# Altium PCB 水表通用工装一版PCB.PcbDoc (part 2 of 2)
Units mm, origin at the board's own origin, x right, y up, seen from the top; angles counter-clockwise.
Board outline 56.13 x 113.41 mm, 2 copper layers (Top Layer, Bottom Layer); 164 components, 131 nets, 500 pads, 301 vias.
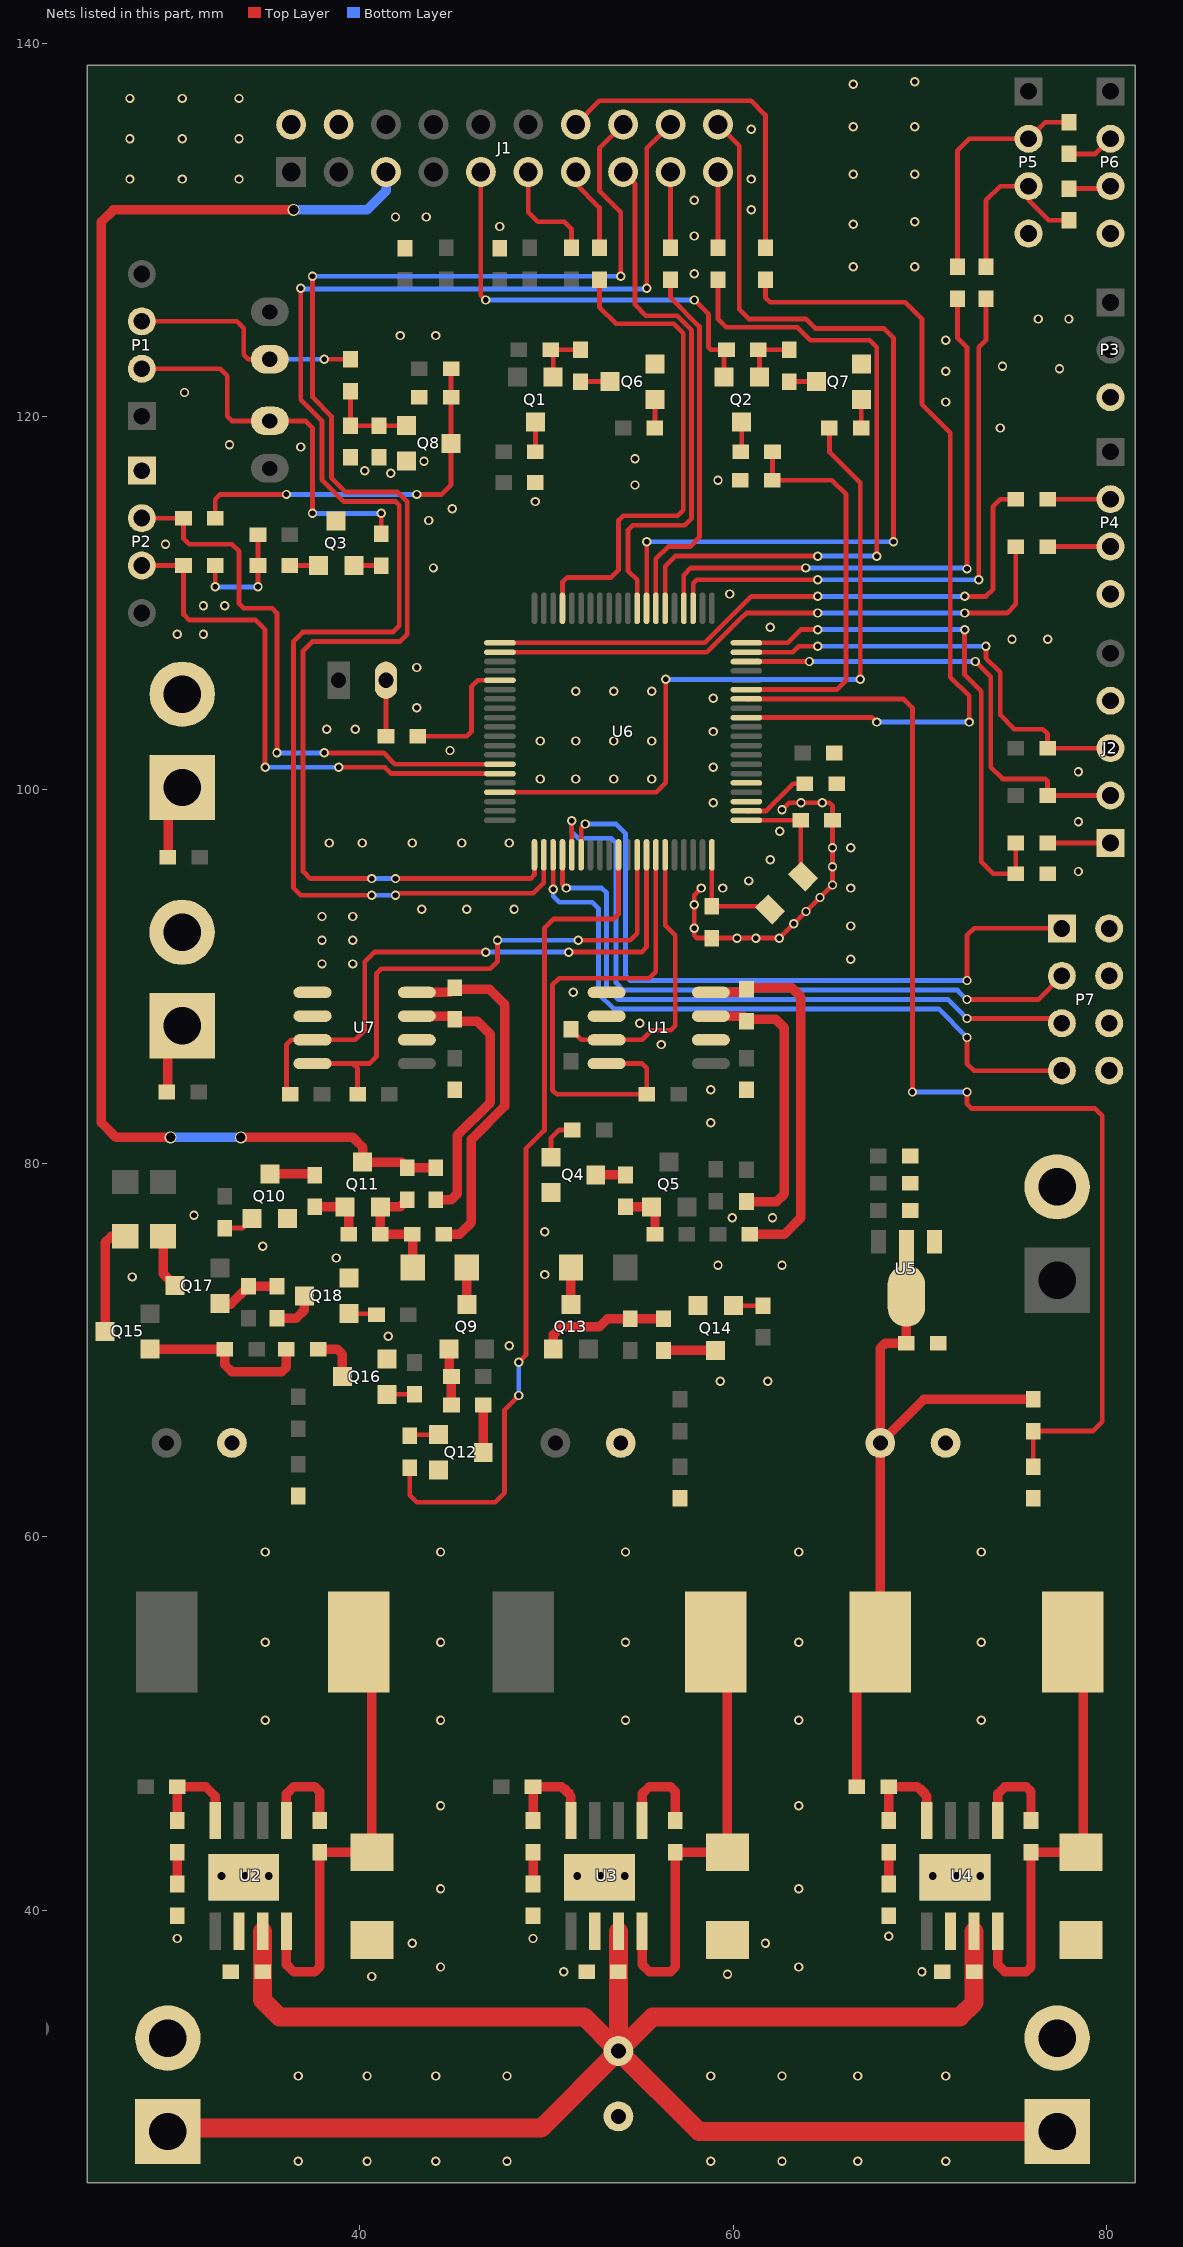
[diagram p2: the nets of this part, all layers, seen from the top]

## Via types
v1: diameter 0.5, hole 0.3, Top Layer to Bottom Layer, tented both sides, 272 vias
v2: diameter 0.635, hole 0.508, Top Layer to Bottom Layer, tented both sides, 20 vias
v3: diameter 0.813, hole 0.406, Top Layer to Bottom Layer, 9 vias

## Nets (pads, with @x,y where several pads share a name; then routed paths per layer and width w, separated by ;. In a path a pad name is that pad's centre, name@x,y a point inside that pad or via, vN(x,y) a via of type N, cw(c..) or ccw(c..) an arc to the next point about the centre after c; other vN are vias at no path point) (continued)
FM_RXD: R77.1 U6.3 | length 31.9
  Top Layer w0.254: U6.3@57.852,109.724 57.852,111.065 58.039,111.252 v1(64.516,111.252) ; v1(73.152,111.252) 73.152,123.698 73.533,124.079 R77.1@73.533,126.314
  Bottom Layer w0.254: v1(64.516,111.252) v1(73.152,111.252)
FM_TXD: R76.1 U6.4 | length 31.8
  Top Layer w0.254: U6.4@57.352,109.724 57.352,111.506 57.733,111.887 v1(63.881,111.887) ; R76.1@72.009,126.314 72.009,124.206 72.517,123.698 v1(72.517,111.835)
  Bottom Layer w0.254: v1(63.881,111.887) 72.465,111.887 v1(72.517,111.835)
GND: C1.1 C2.2 C4.2 C6.2 C7.2 C9.2 C10.2 C12.2 C13.2 C14.2 C15.2 C16.2 C17.2 C18.2 C19.2 C20.1 C21.2 C22.2 C23.1 C24.1 D5.1 D7.1 D8.1 J1.2 J1.4 J2.4 JP1.2 JP2.2 JP3.2 JP4.2 JP5.2 P2.1 P3.3 P4.4 P5.4 P6.4 P7.2 P7.4 P7.6 P7.8 Q3.3 Q4.2 Q6.2 Q7.2 Q8.2 Q10.2 Q12.2 Q14.2 Q16.2 Q18.2 R16.2 R18.2 R24.1 R29.1 R34.1 R45.1 R57.1 R60.1 R72.1 R74.1 R75.1 U1.1 U1.2 U1.6 U2.6 U2.9 U3.6 U3.9 U4.6 U4.9 U5.1 U6.63 U6.65 U7.1 U7.2 U7.6 | length 18.5
  Top Layer w0.254: v1(58.293,94.742) 57.912,94.361 57.912,92.202 58.051,92.063 C23.1@58.852,92.063 v1(60.198,92.063) v1(61.214,92.063) v1(62.472,92.063) v1(63.246,92.837) v1(63.894,93.485) v1(64.643,94.234) v1(65.316,94.907) C22.2@65.316,98.374 65.316,99.149 65.151,99.314 62.992,99.314 v1(62.611,98.933)
  other v1: 36.703,26.543 40.386,26.543 44.069,26.543 47.879,26.543 58.801,26.543 62.611,26.543 66.675,26.543 71.374,26.543 36.703,31.115 40.386,31.115 44.069,31.115 47.879,31.115 58.801,31.115 62.611,31.115 66.675,31.115 71.374,31.115 40.64,36.449 59.69,36.576 50.927,36.703 70.104,36.703 44.323,36.957 63.5,36.957 42.799,38.227 61.722,38.227 30.226,38.481 49.276,38.481 68.326,38.608 44.323,41.148 63.5,41.148 44.323,45.593 63.5,45.593 34.925,50.165 44.323,50.165 54.229,50.165 63.5,50.165 73.279,50.165 34.925,54.356 44.323,54.356 54.229,54.356 63.5,54.356 73.279,54.356 34.925,59.182 44.323,59.182 54.229,59.182 63.5,59.182 73.279,59.182 59.309,68.326 61.849,68.326 48.006,70.231 41.529,70.739 27.813,73.914 49.911,74.041 59.182,74.549 62.611,74.549 38.735,74.93 34.798,75.565 49.911,76.327 59.944,77.089 62.103,77.089 31.115,77.216 58.801,82.169 58.801,83.947 56.134,86.36 54.991,87.503 51.435,89.154 37.973,90.678 39.624,90.678 66.294,90.932 37.973,91.948 39.624,91.948 57.912,92.583 66.294,92.71 37.973,93.218 39.624,93.218 43.307,93.599 45.72,93.599 48.26,93.599 57.912,93.853 59.436,94.742 66.294,94.742 60.833,95.123 78.486,95.631 65.316,95.885 61.976,96.266 65.316,96.901 66.294,96.901 38.354,97.155 40.132,97.155 42.799,97.155 45.466,97.155 48.006,97.155 62.484,97.79 78.486,98.298 58.928,99.314 63.627,99.314 64.77,99.314 49.657,100.584 51.562,100.584 53.594,100.584 55.626,100.584 78.486,100.965 58.928,101.219 44.831,102.108 49.657,102.616 51.562,102.616 53.594,102.616 55.626,102.616 58.928,103.124 38.227,103.251 39.751,103.251 43.053,104.394 58.928,104.902 51.562,105.283 53.594,105.283 55.626,105.283 43.053,106.553 74.93,108.077 76.835,108.077 30.226,108.331 31.623,108.331 61.976,108.712 31.623,109.855 32.766,109.855 59.817,110.49 43.942,111.887 29.591,113.157 43.688,114.427 44.958,115.062 49.403,115.443 54.737,116.332 59.182,116.586 41.656,116.967 40.259,117.094 43.434,117.602 54.737,117.729 36.83,118.364 33.02,118.491 74.295,119.38 71.374,120.777 30.607,121.285 71.374,122.428 77.47,122.555 74.422,122.682 71.374,124.079 42.164,124.333 44.069,124.333 76.327,125.222 77.978,125.222 57.912,127.635 66.421,128.016 69.723,128.016 57.912,129.667 47.498,130.175 66.421,130.302 69.723,130.429 41.91,130.683 43.561,130.683 60.96,131.064 57.912,131.572 27.686,132.715 30.48,132.715 33.528,132.715 60.96,132.715 66.421,132.969 69.723,132.969 27.686,134.874 30.48,134.874 33.528,134.874 60.96,135.382 66.421,135.509 69.723,135.509 27.686,137.033 30.48,137.033 33.528,137.033 66.421,137.795 69.723,137.922
  other v3: 32.588,41.827 33.858,41.827 35.128,41.827 51.638,41.827 52.908,41.827 54.178,41.827 70.688,41.827 71.958,41.827 73.228,41.827
gongwei1: P7.1 U6.46 | length 37.8
  Top Layer w0.254: U6.46@51.852,96.524 51.852,97.953 v1(52.07,98.171) ; v1(72.517,89.789) 72.517,92.202 72.898,92.583 P7.1@77.597,92.583
  Bottom Layer w0.254: v1(52.07,98.171) 53.721,98.171 54.229,97.663 54.229,90.043 54.483,89.789 v1(72.517,89.789)
gongwei2: P7.3 U6.45 | length 37.3
  Top Layer w0.254: U6.45@51.352,96.524 v1(51.352,98.342) ; v1(72.517,88.773) 76.327,88.773 P7.3@77.597,90.043
  Bottom Layer w0.254: v1(51.352,98.342) 51.352,97.746 51.689,97.409 53.467,97.409 53.721,97.155 53.721,89.662 54.102,89.281 72.009,89.281 v1(72.517,88.773)
gongwei3: P7.5 U6.44 | length 34.4
  Top Layer w0.254: U6.44@50.852,96.524 50.852,94.944 v1(51.054,94.742) ; v1(72.517,87.757) 77.343,87.757 P7.5@77.597,87.503
  Bottom Layer w0.254: v1(51.054,94.742) 52.959,94.742 53.213,94.488 53.213,89.408 53.848,88.773 71.501,88.773 v1(72.517,87.757)
gongwei4: P7.7 U6.43 | length 36.8
  Top Layer w0.254: v1(50.352,94.675) U6.43@50.352,96.524 ; v1(72.517,86.741) 72.517,85.344 72.898,84.963 P7.7@77.597,84.963
  Bottom Layer w0.254: v1(50.352,94.675) 50.352,94.301 50.673,93.98 52.451,93.98 52.781,93.65 52.781,89.078 53.594,88.265 70.993,88.265 v1(72.517,86.741)
INA1_SCL: R2.2 U1.4 U6.54 | length 26.5
  Top Layer w0.254: U1.4@53.213,85.344 55.118,85.344 55.372,85.09 R2.2@55.372,83.693 50.546,83.693 50.317,83.922 50.317,89.56 50.673,89.916 55.499,89.916 55.852,90.269 U6.54@55.852,96.524
INA1_SDA: R3.2 U1.3 U6.55 | length 15.5
  Top Layer w0.254: R3.2@51.308,87.173 51.867,86.614 U1.3@53.213,86.614 55.118,86.614 55.626,87.122 56.642,87.122 56.896,87.376 56.896,92.202 56.352,92.746 U6.55@56.352,96.524
INA2_SCL: R28.2 U6.52 U7.4 | length 29.5
  Top Layer w0.254: U7.4@37.465,85.344 39.624,85.344 ; R28.2@39.878,83.693 39.878,85.09 39.624,85.344 ; v1(47.371,91.948) 47.371,90.805 46.99,90.424 41.148,90.424 40.894,90.17 40.894,85.725 40.513,85.344 39.624,85.344 ; v1(51.689,91.948) 54.483,91.948 54.852,92.317 U6.52@54.852,96.524
  Bottom Layer w0.254: v1(47.371,91.948) v1(51.689,91.948)
INA2_SDA: R32.2 U6.53 U7.3 | length 31.4
  Top Layer w0.254: R32.2@36.271,83.693 36.068,83.693 36.068,86.36 36.322,86.614 U7.3@37.465,86.614 39.751,86.614 40.259,87.122 40.259,90.805 40.767,91.313 v1(46.736,91.313) ; v1(51.181,91.313) 55.098,91.313 55.352,91.567 U6.53@55.352,96.524
  Bottom Layer w0.254: v1(46.736,91.313) v1(51.181,91.313)
IO1: J1.15 U6.9 | length 29.1
  Top Layer w0.254: J1.15@54.102,133.096 54.737,132.461 54.737,125.984 55.321,125.4 56.999,125.4 57.76,124.639 57.76,114.529 57.404,114.173 54.616,114.173 54.356,113.913 54.356,111.748 54.852,111.252 U6.9@54.852,109.724
IO2: J1.20 U6.8 | length 47
  Top Layer w0.254: U6.8@55.352,109.724 55.372,109.744 v1(55.372,113.284) ; J1.20@59.182,135.636 60.325,134.493 60.325,125.73 60.833,125.222 63.881,125.222 64.389,124.714 68.072,124.714 68.58,124.206 v1(68.58,113.284)
  Bottom Layer w0.254: v1(55.372,113.284) v1(68.58,113.284)
IR_R: C2.1 Q8.3 R1.2 R27.2 | length 20.2
  Top Layer w0.254: R27.2@32.258,114.554 32.258,115.57 32.512,115.824 v1(36.068,115.824) ; v1(43.053,115.824) 44.38,115.824 44.888,116.332 Q8.3@44.888,118.557 C2.1@44.888,121.031 R1.2@44.888,122.555
  Bottom Layer w0.254: v1(36.068,115.824) v1(43.053,115.824)
IR_RXD: P2.2 R27.1 U6.34 | length 31.4
  Top Layer w0.254: P2.2@28.194,114.554 R27.1@30.556,114.554 30.556,113.462 30.861,113.157 33.147,113.157 33.528,112.776 33.528,109.982 33.782,109.728 35.306,109.728 35.56,109.474 v1(35.56,101.981) ; v1(38.1,101.981) 41.275,101.981 41.882,101.374 U6.34@47.502,101.374
  Bottom Layer w0.254: v1(35.56,101.981) v1(38.1,101.981)
IR_T: R11.1 R17.1 R25.2 | length 6.2
  Top Layer w0.254: v1(32.258,110.871) R25.2@32.258,112.014 ; v1(34.544,110.871) R17.1@34.544,112.014 R11.1@34.544,113.665
  Bottom Layer w0.254: v1(32.258,110.871) v1(34.544,110.871)
IR_TXD: P2.3 R25.1 U6.35 | length 29.8
  Top Layer w0.254: P2.3@28.194,112.014 R25.1@30.556,112.014 30.556,109.398 30.861,109.093 34.417,109.093 34.925,108.585 v1(34.925,101.219) ; v1(38.862,101.219) 41.347,101.219 41.692,100.874 U6.35@47.502,100.874
  Bottom Layer w0.254: v1(34.925,101.219) v1(38.862,101.219)
LED: R65.1 U6.25 | length 7.1
  Top Layer w0.254: R65.1@43.104,102.87 45.72,102.87 45.974,103.124 45.974,105.537 46.311,105.874 U6.25@47.502,105.874
MCU_RXD: R48.1 U6.6 | length 36.2
  Top Layer w0.254: U6.6@56.352,109.724 56.352,111.978 56.896,112.522 v1(64.516,112.522) ; R48.1@59.182,127.33 59.182,125.222 59.627,124.777 63.436,124.777 64.135,124.079 67.31,124.079 67.691,123.698 v1(67.691,112.522)
  Bottom Layer w0.254: v1(64.516,112.522) v1(67.691,112.522)
MCU_TXD: R47.1 U6.7 | length 19.9
  Top Layer w0.254: U6.7@55.852,109.724 55.852,112.367 56.515,113.03 57.683,113.03 58.191,113.538 58.191,124.818 56.642,126.367 R47.1@56.642,127.33
NetC3_1: C3.1 R10.2 U1.7 | length 15.3
  Top Layer w0.508: U1.7@58.801,87.884 60.528,87.884 60.706,87.706 62.281,87.706 62.738,87.249 62.738,78.359 62.332,77.953 R10.2@60.706,77.953
NetC3_2: C3.2 R23.2 U1.8 | length 20.1
  Top Layer w0.508: U1.8@58.801,89.154 60.452,89.154 60.706,89.408 63.119,89.408 63.627,88.9 63.627,77.089 62.738,76.2 R23.2@60.884,76.2
NetC4_1: C4.1 Q8.1 R21.1 R24.2 | length 4.8
  Top Layer w0.254: R21.1@39.497,121.285 R24.2@39.497,119.507 C4.1@41.021,119.507 Q8.1@42.488,119.507
NetC5_1: C5.1 D5.2 L1.1 U2.8 | length 24.3
  Top Layer w0.508: U2.8@36.068,38.862 36.068,37.084 36.449,36.703 37.592,36.703 37.846,36.957 C5.1@37.846,43.1 D5.2@40.64,43.1 40.64,53.664 L1.1@39.948,54.356
NetC5_2: C5.2 U2.1 | length 5
  Top Layer w0.508: U2.1@36.068,44.802 36.068,46.228 36.449,46.609 37.592,46.609 37.846,46.355 C5.2@37.846,44.802
NetC8_1: C8.1 D7.2 L2.1 U3.8 | length 24.3
  Top Layer w0.508: U3.8@55.118,38.862 55.118,37.084 55.499,36.703 56.642,36.703 56.896,36.957 C8.1@56.896,43.1 D7.2@59.69,43.1 59.69,53.664 L2.1@58.998,54.356
NetC8_2: C8.2 U3.1 | length 5
  Top Layer w0.508: U3.1@55.118,44.802 55.118,46.228 55.499,46.609 56.642,46.609 56.896,46.355 C8.2@56.896,44.802
NetC11_1: C11.1 D8.2 L3.1 U4.8 | length 24.3
  Top Layer w0.508: U4.8@74.168,38.862 74.168,37.084 74.549,36.703 75.692,36.703 75.946,36.957 C11.1@75.946,43.1 78.74,43.1 78.74,53.664 L3.1@78.048,54.356
NetC11_2: C11.2 U4.1 | length 5
  Top Layer w0.508: U4.1@74.168,44.802 74.168,46.228 74.549,46.609 75.692,46.609 75.946,46.355 C11.2@75.946,44.802
NetC19_1: C19.1 U6.62 | length 3.7
  Top Layer w0.254: U6.62@60.702,98.874 61.767,98.874 63.223,100.33 C19.1@63.83,100.33
NetC25_1: C25.1 R36.2 U7.7 | length 14.9
  Top Layer w0.508: U7.7@43.053,87.884 44.907,87.884 C25.1@45.085,87.706 45.174,87.618 46.279,87.618 46.99,86.906 46.99,83.266 45.212,81.488 45.212,78.359 44.907,78.054 R36.2@44.069,78.054
NetC25_2: C25.2 R55.2 U7.8 | length 19.3
  Top Layer w0.508: U7.8@43.053,89.154 44.831,89.154 C25.2@45.085,89.408 45.174,89.319 46.952,89.319 47.752,88.519 47.752,83.058 45.974,81.28 45.974,76.835 45.339,76.2 R55.2@44.501,76.2
NetD1_2: D1.2 P1.2 R8.2 | length 21.2
  Top Layer w0.254: P1.2@28.194,122.555 32.512,122.555 32.893,122.174 32.893,120.015 33.147,119.761 D1.2@35.179,119.761 37.084,119.761 37.465,119.38 v1(37.465,114.808) ; R8.2@41.148,113.716 v1(41.148,114.808)
  Bottom Layer w0.254: v1(37.465,114.808) v1(41.148,114.808)
NetD2_1: D2.1 P1.3 R21.2 | length 13
  Top Layer w0.254: P1.3@28.194,125.095 33.401,125.095 33.782,124.714 33.782,123.317 34.036,123.063 D2.1@35.179,123.063 ; v1(38.1,123.063) R21.2@39.497,123.063
  Bottom Layer w0.254: D2.1@35.179,123.063 v1(38.1,123.063)
NetD3_1: D3.1 Q9.3 | length 2
  Top Layer w0.508: Q9.3@45.73,72.447 D3.1@45.73,74.422
NetD4_1: D4.1 Q17.3 | length 3.2
  Top Layer w0.508: D4.1@29.661,75.897 D4.1@29.464,76.094 29.464,74.091 Q17.3@30.101,73.454
NetD6_1: D6.1 Q13.3 | length 2
  Top Layer w0.508: Q13.3@51.308,72.447 D6.1@51.308,74.422
NetD9_2: D9.2 R65.2 | length 3
  Top Layer w0.254: R65.2@41.402,102.87 D9.2@41.402,105.874
NetD10_1: D10.1 Q15.3 | length 6
  Top Layer w0.508: Q15.3@26.359,70.993 26.359,75.762 26.691,76.094 D10.1@27.432,76.094
NetJ1_11: J1.11 R40.2 | length 5.9
  Top Layer w0.254: J1.11@49.022,133.096 49.022,130.937 49.53,130.429 50.952,130.429 51.333,130.048 R40.2@51.333,129.032
NetJ1_13: J1.13 R41.2 | length 4.6
  Top Layer w0.254: J1.13@51.562,133.096 51.562,132.461 52.832,131.191 R41.2@52.832,129.032
NetJ2_1: J2.1 R63.2 | length 3.4
  Top Layer w0.254: R63.2@76.835,97.155 J2.1@80.2,97.155
NetJP1_1: JP1.1 R35.2 | length 3.8
  Top Layer w0.508: R35.2@29.718,83.693 JP1.1@29.718,87.503
NetJP5_1: JP5.1 R52.2 | length 3.9
  Top Layer w0.508: R52.2@29.727,96.393 JP5.1@29.727,100.255
NetP4_2: P4.2 R61.2 | length 3.3
  Top Layer w0.254: R61.2@76.886,115.57 P4.2@80.2,115.57
NetP4_3: P4.3 R62.2 | length 3.4
  Top Layer w0.254: R62.2@76.835,113.03 P4.3@80.2,113.03
NetP6_2: P6.2 R78.2 | length 2.6
  Top Layer w0.254: R78.2@77.978,134.061 79.387,134.061 P6.2@80.2,134.874
NetP6_3: P6.3 R79.2 | length 2.3
  Top Layer w0.254: R79.2@77.978,132.207 80.073,132.207 P6.3@80.2,132.334
NetQ1_1: Q1.1 R4.1 R9.1 | length 3.1
  Top Layer w0.254: Q1.1@50.353,122.104 50.353,123.434 R4.1@50.216,123.571 R9.1@51.816,123.571
NetQ1_3: Q1.3 R6.1 | length 1.6
  Top Layer w0.254: R6.1@49.403,118.11 Q1.3@49.403,119.704
NetQ2_1: Q2.1 R5.1 R12.1 | length 3.1
  Top Layer w0.254: Q2.1@61.402,122.104 61.402,123.51 R5.1@61.341,123.571 R12.1@62.992,123.571
NetQ2_3: Q2.3 R7.1 | length 1.6
  Top Layer w0.254: R7.1@60.452,118.11 Q2.3@60.452,119.704
NetQ3_1: Q3.1 R17.2 | length 1.5
  Top Layer w0.254: R17.2@36.246,112.014 Q3.1@37.785,112.014
NetQ3_2: Q3.2 R8.1 | length 1.5
  Top Layer w0.254: Q3.2@39.685,112.014 R8.1@41.148,112.014
NetQ4_1: Q4.1 R14.1 | length 2.4
  Top Layer w0.254: Q4.1@50.235,80.325 50.235,81.35 50.673,81.788 R14.1@51.384,81.788
NetQ4_3: Q4.3 R13.2 | length 1.6
  Top Layer w0.508: Q4.3@52.635,79.375 R13.2@54.229,79.375
NetQ5_1: Q5.1 R13.1 R22.1 | length 2.9
  Top Layer w0.508: R13.1@54.229,77.673 54.235,77.667 Q5.1@55.61,77.667 55.808,77.469 R22.1@55.808,76.2
NetQ6_1: Q6.1 R19.2 | length 1.5
  Top Layer w0.254: R19.2@55.804,119.38 55.81,119.386 Q6.1@55.81,120.919
NetQ6_3: Q6.3 R9.2 | length 1.6
  Top Layer w0.254: R9.2@51.816,121.869 Q6.3@53.41,121.869
NetQ7_1: Q7.1 R20.2 | length 1.5
  Top Layer w0.254: R20.2@66.853,119.38 66.859,119.386 Q7.1@66.859,120.919
NetQ7_3: Q7.3 R12.2 | length 1.5
  Top Layer w0.254: R12.2@62.992,121.869 Q7.3@64.459,121.869
NetQ9_1: Q9.1 R33.2 R42.2 | length 3.2
  Top Layer w0.254: Q9.1@44.78,70.047 Q9.1@44.907,69.92
  Top Layer w0.508: Q9.1@44.78,70.047 44.78,68.707 R33.2@44.907,68.58 R42.2@44.907,67.056
NetQ10_1: Q10.1 R50.1 | length 1.7
  Top Layer w0.254: R50.1@32.766,76.53 33.727,76.53 Q10.1@34.229,77.032
NetQ10_3: Q10.3 R37.2 | length 2.4
  Top Layer w0.508: Q10.3@35.179,79.432 37.529,79.432 R37.2@37.592,79.369
NetQ11_1: Q11.1 R37.1 R54.1 | length 3.2
  Top Layer w0.508: R37.1@37.592,77.667 Q11.1@39.203,77.667 39.401,77.469 R54.1@39.401,76.2
NetQ12_1: Q12.1 R53.2 | length 1.5
  Top Layer w0.254: R53.2@42.748,65.466 Q12.1@44.209,65.466
NetQ12_3: Q12.3 R42.1 | length 2.5
  Top Layer w0.508: Q12.3@46.609,64.516 R42.1@46.609,67.056
NetQ13_1: Q13.1 R39.2 R44.2 | length 7
  Top Layer w0.508: Q13.1@50.358,70.047 50.358,70.805 50.8,71.247 52.832,71.247 53.264,71.679 R39.2@54.483,71.679 R44.2@56.261,71.679
NetQ14_1: Q14.1 R46.2 | length 1.6
  Top Layer w0.254: Q14.1@60.005,72.377 R46.2@61.595,72.377
NetQ14_3: Q14.3 R44.1 | length 2.8
  Top Layer w0.508: R44.1@56.261,69.977 Q14.3@59.055,69.977
NetQ15_1: Q15.1 R67.2 R68.2 | length 9.4
  Top Layer w0.508: Q15.1@28.759,70.043 R67.2@32.766,70.043 32.766,69.215 33.147,68.834 35.814,68.834 36.068,69.088 R68.2@36.068,70.043
NetQ16_1: Q16.1 R69.2 | length 1.5
  Top Layer w0.254: Q16.1@41.459,67.63 R69.2@42.926,67.63
NetQ16_3: Q16.3 R68.1 | length 2.6
  Top Layer w0.508: R68.1@37.77,70.043 38.796,70.043 39.059,69.78 Q16.3@39.059,68.58
NetQ17_1: Q17.1 R80.2 R81.2 | length 3.5
  Top Layer w0.508: Q17.1@32.501,72.456 33.086,72.456 R80.2@34.036,73.406 R81.2@35.56,73.406
NetQ18_1: Q18.1 R82.2 | length 1.5
  Top Layer w0.254: Q18.1@39.427,71.948 40.828,71.948 R82.2@40.894,71.882
NetQ18_3: Q18.3 R81.1 | length 2.4
  Top Layer w0.508: R81.1@35.56,71.704 36.595,71.704 37.027,72.136 Q18.3@37.027,72.898
NetR29_2: R29.2 R30.1 | length 1.7
  Top Layer w0.508: R29.2@30.226,41.402 R30.1@30.226,43.1
NetR30_2: R30.2 R31.1 U2.4 | length 5.3
  Top Layer w0.508: R30.2@30.226,44.802 R31.1@30.226,46.609 31.75,46.609 32.258,46.101 U2.4@32.258,44.802
NetR43_1: R43.1 R73.2 U3.4 | length 10.8
  Top Layer w0.254: R73.2@49.276,44.802 R43.1@49.276,46.609 51.054,46.609 51.308,46.355 U3.4@51.308,44.802
  Top Layer w0.508: R73.2@49.276,44.802 R43.1@49.276,46.609 50.8,46.609 51.308,46.101 U3.4@51.308,44.802
NetR57_2: R57.2 R58.1 | length 1.7
  Top Layer w0.508: R57.2@68.326,41.402 R58.1@68.326,43.1
NetR58_2: R58.2 R59.2 U4.4 | length 10.8
  Top Layer w0.254: R58.2@68.326,44.802 R59.2@68.326,46.609 70.104,46.609 70.358,46.355 U4.4@70.358,44.802
  Top Layer w0.508: R58.2@68.326,44.802 R59.2@68.326,46.609 69.85,46.609 70.358,46.101 U4.4@70.358,44.802
NetR72_2: R72.2 R73.1 | length 1.7
  Top Layer w0.508: R72.2@49.276,41.402 R73.1@49.276,43.1
OPEN: R41.1 U6.17 | length 27.1
  Top Layer w0.254: U6.17@50.852,109.724 50.852,111.125 51.106,111.379 53.467,111.379 53.848,111.76 53.848,114.427 54.102,114.681 57.023,114.681 57.328,114.986 57.328,124.46 56.82,124.968 53.721,124.968 52.832,125.857 R41.1@52.832,127.33
PC_RXD: P5.2 R76.2 R78.1 | length 12.8
  Top Layer w0.254: R76.2@72.009,128.016 72.009,134.239 72.644,134.874 P5.2@75.819,134.874 76.708,135.763 R78.1@77.978,135.763
PC_TXD: P5.3 R77.2 R79.1 | length 9.5
  Top Layer w0.254: R77.2@73.533,128.016 73.533,131.572 74.295,132.334 P5.3@75.819,132.334 75.819,131.572 76.886,130.505 R79.1@77.978,130.505
RF_NB_CTL: R53.1 U6.50 | length 45.5
  Top Layer w0.254: R53.1@42.672,63.703 42.672,62.23 43.053,61.849 47.244,61.849 47.752,62.357 47.752,66.802 v1(48.514,67.564) ; v1(48.514,69.342) 48.895,69.723 48.895,80.772 49.886,81.763 49.886,92.583 50.394,93.091 53.594,93.091 53.852,93.349 U6.50@53.852,96.524
  Bottom Layer w0.254: v1(48.514,67.564) v1(48.514,69.342)
RF_NB_GD: D3.2 Q11.2 R51.1 R54.2 R55.1 | length 6.6
  Top Layer w0.508: R51.1@42.545,78.054 42.158,77.667 Q11.2@41.103,77.667 R54.2@41.103,76.2 R55.1@42.799,76.2 42.83,76.169 D3.2@42.83,74.422
RF_NB_GD1: J1.5 Q11.3 R36.1 R51.2 | length 84.6
  Top Layer w0.508: v2(29.866,81.386) 26.945,81.386 26.162,82.169 26.162,130.429 26.797,131.064 v2(36.449,131.064) ; v2(33.634,81.386) 39.624,81.386 40.153,80.857 Q11.3@40.153,80.067 42.234,80.067 R51.2@42.545,79.756 R36.1@44.069,79.756
  Bottom Layer w0.508: v2(29.866,81.386) v2(33.634,81.386) ; v2(36.449,131.064) 40.386,131.064 41.402,132.08 J1.5@41.402,133.096
RST: C21.1 R63.1 U6.80 | length 28.6
  Top Layer w0.254: U6.80@60.702,107.874 62.916,107.874 63.627,108.585 v1(64.516,108.585) ; v1(72.39,108.585) 72.39,106.172 73.279,105.283 73.279,96.139 73.914,95.504 C21.1@75.133,95.504 R63.1@75.133,97.155
  Bottom Layer w0.254: v1(64.516,108.585) v1(72.39,108.585)
RXD: J1.19 R48.2 | length 4.1
  Top Layer w0.254: R48.2@59.182,129.032 J1.19@59.182,133.096
Simulate_RXD: R61.1 U6.21 | length 33.4
  Top Layer w0.254: U6.21@47.502,107.874 58.471,107.874 60.96,110.363 v1(64.516,110.363) ; v1(72.39,110.363) 73.533,110.363 73.914,110.744 73.914,115.189 74.295,115.57 R61.1@75.133,115.57
  Bottom Layer w0.254: v1(64.516,110.363) v1(72.39,110.363)
Simulate_TXD: R62.1 U6.22 | length 31.8
  Top Layer w0.254: U6.22@47.502,107.374 58.582,107.374 60.503,109.295 60.527,109.295 60.706,109.474 v1(64.516,109.474) ; v1(72.39,109.474) 74.676,109.474 75.133,109.931 R62.1@75.133,113.03
  Bottom Layer w0.254: v1(64.516,109.474) v1(72.39,109.474)
SWCLK: J2.2 R64.2 U6.78 | length 25.8
  Top Layer w0.254: U6.78@60.702,106.874 v1@64.075,106.874 ; v1(72.969,106.878) 73.787,106.06 73.787,101.219 74.422,100.584 76.708,100.584 76.835,100.457 R64.2@76.835,99.695 J2.2@80.2,99.695
  Bottom Layer w0.254: v1(64.079,106.878) v1(72.969,106.878)
SWDIO: J2.3 R66.2 U6.79 | length 24.1
  Top Layer w0.254: U6.79@60.702,107.374 63.178,107.374 63.5,107.696 v1(64.516,107.696) ; v1(73.533,107.696) 73.533,107.061 74.295,106.299 74.295,104.013 75.057,103.251 76.581,103.251 76.835,102.997 R66.2@76.835,102.235 J2.3@80.2,102.235
  Bottom Layer w0.254: v1(64.516,107.696) v1(73.533,107.696)
TXD: J1.17 R47.2 | length 4.1
  Top Layer w0.254: R47.2@56.642,129.032 J1.17@56.642,133.096
VCC_RF_NB: J1.9 Q2.2 R5.2 | length 23.5
  Top Layer w0.254: J1.9@46.482,133.096 46.482,126.492 v1(46.736,126.238) ; v1(57.912,126.238) 58.674,125.476 58.674,123.698 58.801,123.571 R5.2@59.639,123.571 59.502,123.434 Q2.2@59.502,122.104
  Bottom Layer w0.254: v1(46.736,126.238) v1(57.912,126.238)
VCC_RF_NB_CHK: R7.2 R18.1 U6.75 | length 21.3
  Top Layer w0.254: U6.75@60.702,105.374 65.532,105.374 66.04,105.882 66.04,115.824 65.278,116.586 R18.1@62.078,116.586 62.103,116.611 R7.2@62.103,118.11
VCC_RF_NB_CHK_CTR: R20.1 U6.37 | length 39.2
  Top Layer w0.254: U6.37@47.502,99.874 55.88,99.874 56.388,100.382 v1(56.388,105.918) ; R20.1@65.151,119.38 65.151,118.11 66.802,116.459 v1(66.802,105.918)
  Bottom Layer w0.254: v1(56.388,105.918) v1(66.802,105.918)
VIN_5V: C14.1 C16.1 L3.2 R56.2 R59.1 U5.2 | length 37.2
  Top Layer w0.508: R59.1@66.624,46.609 66.624,53.105 L3.2@67.875,54.356 C14.1@67.875,65.024 ; U5.2@69.272,72.898 C16.1@69.272,70.358 68.129,70.358 67.875,70.104 C14.1@67.875,65.024 ; R56.2@76.073,67.361 70.212,67.361 C14.1@67.875,65.024
VIN_5V_CHK: R56.1 R60.2 U6.74 | length 62.9
  Top Layer w0.254: U6.74@60.702,104.874 69.116,104.874 69.596,104.394 v1(69.596,83.82) ; v1(72.517,83.82) 72.517,83.185 72.771,82.931 79.375,82.931 79.756,82.55 79.756,66.167 79.248,65.659 R56.1@76.073,65.659 R60.2@76.073,63.754
  Bottom Layer w0.254: v1(69.596,83.82) v1(72.517,83.82)
VIN_24V: C6.1 C9.1 C12.1 C13.1 JP2.1 JP3.1 U2.7 U3.7 U4.7 | length 105.4
  Top Layer w1.016: JP3.1@29.718,28.147 29.892,28.321 49.713,28.321 C12.1@53.848,32.456 ; U2.7@34.798,38.862 C6.1@34.798,36.703 34.798,35.179 35.687,34.29 52.014,34.29 C12.1@53.848,32.456 ; U3.7@53.848,38.862 C9.1@53.848,36.703 C12.1@53.848,32.456 ; U4.7@72.898,38.862 C13.1@72.898,36.703 72.898,35.052 72.136,34.29 55.682,34.29 C12.1@53.848,32.456 ; JP2.1@77.343,28.147 58.157,28.147 C12.1@53.848,32.456
WF7502_D: J1.18 U6.42 | length 84.3
  Top Layer w0.254: v1(36.83,126.873) 36.83,120.904 37.973,119.761 37.973,116.61 39.14,115.443 41.91,115.443 42.113,115.24 42.113,108.788 41.783,108.458 36.957,108.458 36.449,107.95 36.449,94.742 36.83,94.361 v1(40.64,94.361) ; v1(41.91,94.361) 42.012,94.463 49.276,94.463 49.852,95.039 U6.42@49.852,96.524 ; v1(55.372,126.873) 55.372,134.366 J1.18@56.642,135.636
  Bottom Layer w0.254: v1(36.83,126.873) 36.877,126.826 55.325,126.826 v1(55.372,126.873) ; v1(40.64,94.361) v1(41.91,94.361)
WF7502_P: J1.16 U6.41 | length 80
  Top Layer w0.254: v1(37.465,127.508) 37.465,121.031 38.481,120.015 38.481,116.713 39.243,115.951 42.037,115.951 42.545,115.443 42.545,108.331 42.164,107.95 37.465,107.95 36.957,107.442 36.957,95.631 37.338,95.25 v1(40.64,95.25) ; v1(41.91,95.25) 49.149,95.25 49.352,95.453 U6.41@49.352,96.524 ; v1(53.975,127.508) 53.975,130.937 52.832,132.08 52.832,134.366 J1.16@54.102,135.636
  Bottom Layer w0.254: v1(37.465,127.508) v1(53.975,127.508) ; v1(40.64,95.25) v1(41.91,95.25)
WF7502_T: J1.14 R49.2 | length 18.1
  Top Layer w0.254: J1.14@51.562,135.636 52.832,136.906 60.96,136.906 61.722,136.144 R49.2@61.722,129.032
WF7502_TXD: R49.1 U6.72 | length 44.5
  Top Layer w0.254: U6.72@60.702,103.874 67.449,103.874 v1(67.691,103.632) ; R49.1@61.722,127.33 61.722,126.365 61.976,126.111 69.215,126.111 70.104,125.222 70.104,120.65 71.628,119.126 71.628,106.045 72.644,105.029 v1(72.644,103.632)
  Bottom Layer w0.254: v1(67.691,103.632) v1(72.644,103.632)
XT1: C22.1 U6.61 Y1.1 | length 6
  Top Layer w0.254: U6.61@60.702,98.374 C22.1@63.615,98.374 63.615,95.496 Y1.1@63.744,95.367
XT2: C23.2 U6.60 Y1.2 | length 6
  Top Layer w0.254: U6.60@58.852,96.524 C23.2@58.852,93.764 61.811,93.764 Y1.2@61.976,93.599
pads on no net: MARK1.0 MARK1.1 MARK2.0 MARK2.1 MARK3.0 MARK3.1 MARK4.0 MARK4.1 P5.1 P6.1 U2.2 U2.3 U2.5 U3.2 U3.3 U3.5 U4.2 U4.3 U4.5 U6.1 U6.2 U6.5 U6.10 U6.11 U6.12 U6.13 U6.14 U6.15 U6.16 U6.19 U6.20 U6.23 U6.24 U6.26 U6.27 U6.28 U6.29 U6.30 U6.31 U6.32 U6.33 U6.40 U6.47 U6.56 U6.59 U6.67 U6.68 U6.69 U6.71 U6.77

## Polygon pours and split planes (outlines as drawn)
GND on Top Layer "GND" (solid, remove dead copper, pour order 10): 25.4,138.811 81.534,138.811 81.534,25.4 25.4,25.4
GND on Bottom Layer "GND" (solid, remove dead copper, pour order 12): 25.4,138.811 81.534,138.811 81.534,25.4 25.4,25.4

## Keep-outs
Keep-Out Layer:
  lines w0.254: 25.4,25.4 81.534,25.4 ; 25.4,25.4 25.4,138.811 ; 25.4,25.4 20.4,25.4 20.4,252.222 25.4,252.222 ; 25.4,138.811 81.534,138.811 ; 25.4,138.811 25.4,252.222 ; 25.4,138.811 81.534,138.811 ; 25.4,252.222 81.534,252.222 ; 81.534,25.4 81.534,127 81.534,138.811 ; 81.534,25.4 81.534,138.811 ; 81.534,25.4 137.668,25.4 ; 81.534,138.811 137.668,138.811 ; 81.534,138.811 81.534,240.411 81.534,252.222 ; 81.534,138.811 81.534,252.222 ; 81.534,138.811 137.668,138.811 ; 81.534,252.222 137.668,252.222 ; 137.668,25.4 137.668,127 137.668,138.811 ; 137.668,25.4 137.668,138.811 ; 137.668,25.4 193.802,25.4 ; 137.668,138.811 193.802,138.811 ; 137.668,138.811 137.668,240.411 137.668,252.222 ; 137.668,138.811 137.668,252.222 ; 137.668,138.811 193.802,138.811 ; 137.668,252.222 193.802,252.222 ; 193.802,25.4 193.802,127 193.802,138.811 ; 193.802,25.4 198.802,25.4 198.802,252.222 193.802,252.222 ; 193.802,138.811 193.802,240.411 193.802,252.222

## Silkscreen, mask and mechanical layers (free items; w line width, h text height)
Top Overlay:
  text "TXD" at 72.898,134.62 h0.51
  text "RXD" at 72.898,132.08 h0.51
  text "GND" at 72.898,129.54 h0.51
  text "D2+" at 26.67,126.873 h0.51 r90
  text "A" at 78.613,125.857 h0.51 r90
  text "D2-" at 26.67,124.333 h0.51 r90
  text "B" at 78.613,123.317 h0.51 r90
  text "D1-" at 26.67,121.793 h0.51 r90
  text "GND" at 78.613,120.396 h0.51 r90
  text "D1+" at 26.67,119.38 h0.51 r90
  text "3.3V" at 78.613,117.221 h0.51 r90
  text "GND" at 26.67,116.459 h0.51 r90
  text "RXD" at 78.613,114.935 h0.51 r90
  text "IR_R" at 26.67,113.919 h0.51 r90
  text "TXD" at 78.613,112.395 h0.51 r90
  text "IR_T" at 26.67,111.252 h0.51 r90
  text "GND" at 78.613,109.728 h0.51 r90
  text "3.3V" at 26.67,108.839 h0.51 r90
  text "GND" at 34.934,106.859 h1.27 r270
  text "3.3V" at 78.613,106.553 h0.51 r90
  text "GND" at 78.613,104.267 h0.51 r90
  text "12V" at 34.934,101.906 h1.27 r270
  text "DIO" at 78.613,101.6 h0.51 r90
  text "CLK" at 78.613,99.06 h0.51 r90
  text "RST" at 78.644,96.393 h0.51 r90
  text "GND" at 34.925,94.107 h1.27 r270
  text "gw1" at 73.067,92.075 h1.27
  text "gw2" at 72.765,89.535 h1.27
  text "12V" at 34.925,89.154 h1.27 r270
  text "gw3" at 72.765,86.995 h1.27
  text "gw4" at 72.644,84.455 h1.27
  text "GND" at 75.819,81.661 h1.27
  text "3.3V" at 75.184,69.215 h1.27
  text "GND" at 34.417,32.893 h1.27
  text "GND" at 68.834,32.893 h1.27
  text "24V" at 68.707,27.559 h1.27
  text "24V" at 34.544,27.432 h1.27

## Text inside footprints (layer, text, board x,y; h text height)
C7: Top Overlay "+" at 28.553,65.524 h0.51 r180
C10: Top Overlay "+" at 49.38,65.524 h0.51 r180
C12: Top Overlay "+" at 54.348,33.551 h0.51 r90
C14: Top Overlay "+" at 66.78,65.524 h0.51 r180